# Altium PCB PCB1.PcbDoc
Units mil, origin at the board's own origin, x right, y up, seen from the top; angles counter-clockwise.
Board outline 5610.24 x 2499.17 mil, 2 copper layers (Top Layer, Bottom Layer); 30 components, 19 nets, 88 pads, 2 vias.
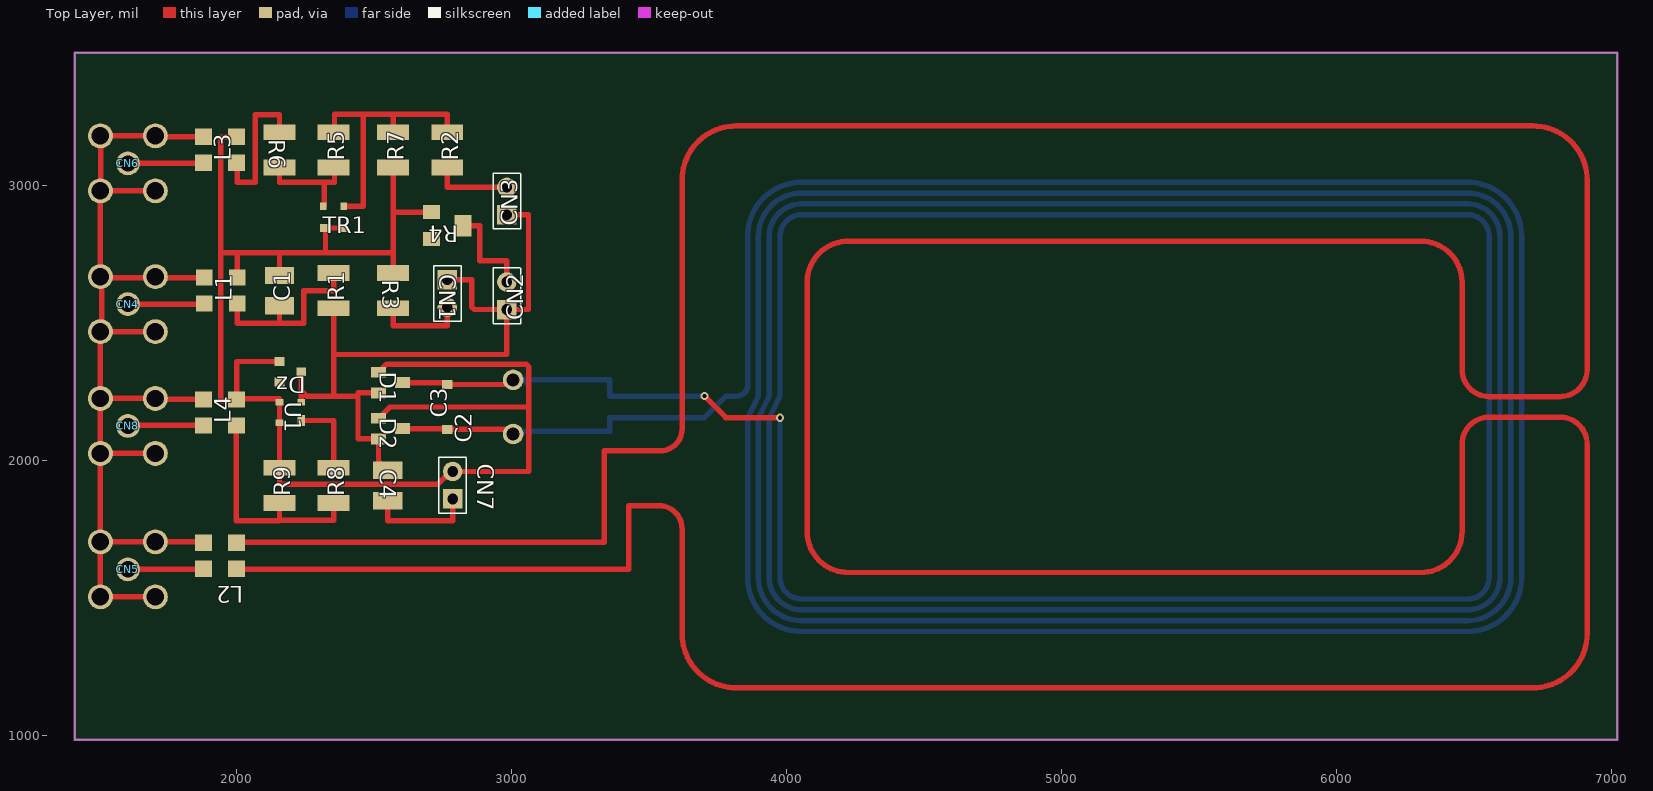
[diagram p0: Top Layer view]
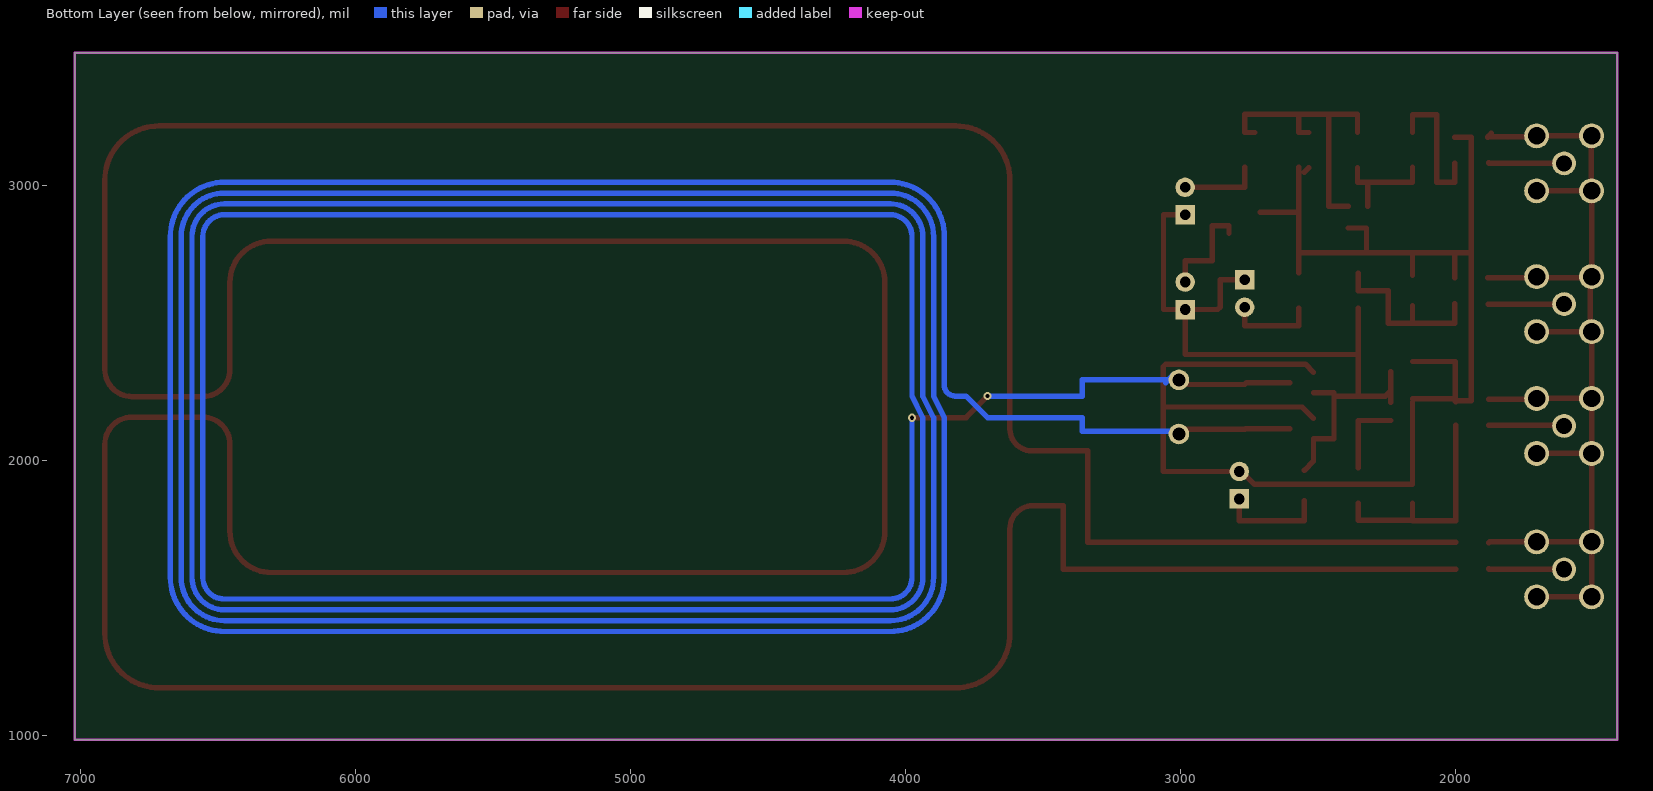
[diagram p1: Bottom Layer view, seen from below]
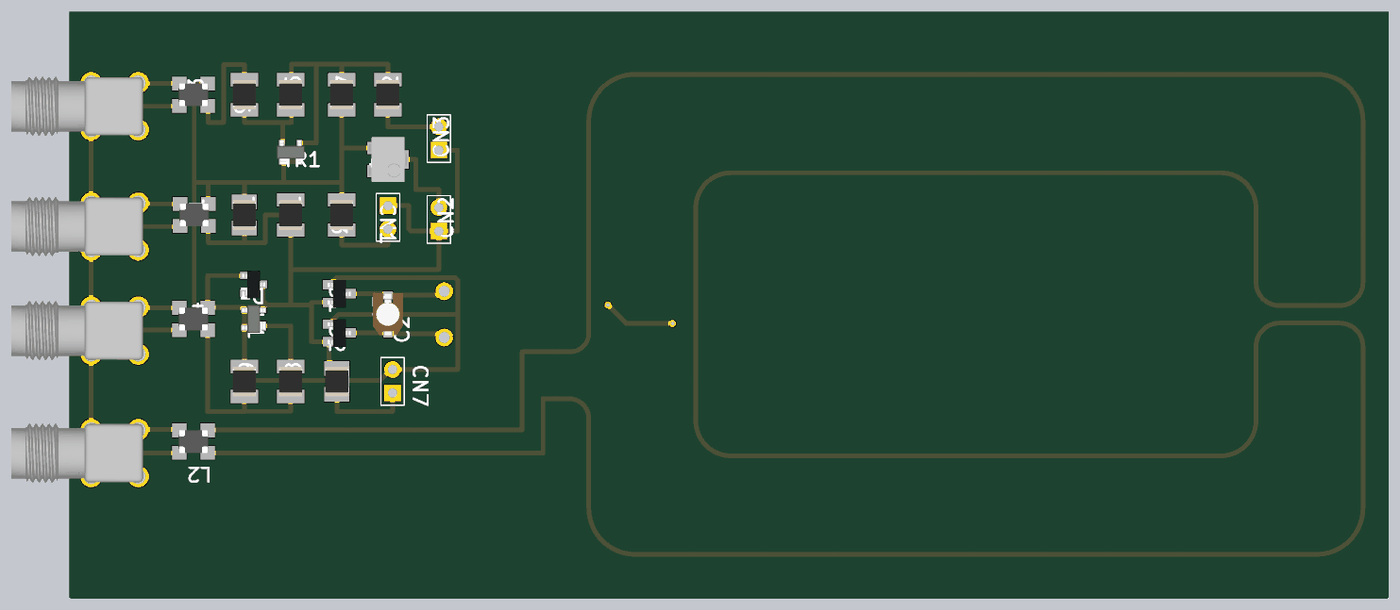
[diagram p2: 3D render of the assembled board from above, using the file's embedded part models]

## Layer stack, top to bottom
Top Solder: solder mask 0.4, Solder Resist, Dk 3.5
Top Layer: signal copper 1.4
Dielectric 1: dielectric 12.6, FR-4, Dk 4.8
Bottom Layer: signal copper 1.4
Bottom Solder: solder mask 0.4, Solder Resist, Dk 3.5

## Board outline
1410.63,984.25 1410.63,3483.43 7020.87,3483.43 7020.87,984.25

## Design rules (kind name [scope] priority, off if disabled: settings)
Clearance [All] p1: gap=10
PolygonConnect [All] p1: connectstyle=Relief reliefconductorwidth=10 reliefentries=4 polygonreliefangle="90 Angle" airgapwidth=10
RoutingVias [All] p1: holewidth=28 width=50 viastyle="Through Hole" minholewidth=28 minwidth=50 maxholewidth=28 maxwidth=50
SolderMaskExpansion [All] p1: expansion=4
Width [All] p1: maxlimit=39.37 minlimit=10 preferedwidth=19.68 minimp=50.000000 maximp=50.000000 favimp=50.000000
29 further rules are at their usual default settings.

## Components (designator, comment, footprint, x,y, rotation, side; value= is the part's Value field where it differs from the comment)
C1 "1nF" C_1210 2155.51,2618.11 r90 top
C2 "GKGXXX15" GKGXXX15 3005.12,2194.88 r90 top
C3 "TZC3" TZC3 2765.75,2194.88 r90 top
C4 "27pF" C_1210 2549.21,1909.45 r270 top
CN1 "C_2" "2x1 Pin Array" 2765.75,2657.48 r270 top
CN2 "C_2" "2x1 Pin Array" 2982.28,2549.21 r90 top
CN3 "C_2" "2x1 Pin Array" 2982.28,2893.7 r90 top
CN4 "Conector SMA" "Conector SMA" 1604.33,2568.9 r90 top
CN5 "Conector SMA" "Conector SMA" 1604.33,1604.33 r90 top
CN6 "Conector SMA" "Conector SMA" 1604.33,3080.71 r90 top
CN7 "C_2" "2x1 Pin Array" 2785.43,1860.24 r90 top
CN8 "Conector SMA" "Conector SMA" 1604.33,2125.98 r90 top
D1 "BAR43S" BAR43S 2559.06,2283.46 r270 top
D2 "BAR43S" BAR43S 2559.06,2116.14 r270 top
Dz "BZX84" BZX84 2194.88,2322.83 r270 top
L1 "ACM3225-2520-2P" ACM3225.2520-2P 1942.13,2618.11 r180 top
L2 "ACM3225-2520-2P" ACM3225.2520-2P 1938.98,1653.54 r180 top
L3 "ACM3225-2520-2P" ACM3225.2520-2P 1938.98,3129.92 r180 top
L4 "ACM3225-2520-2P" ACM3225.2520-2P 1938.98,2175.2 r180 top
R1 "51k" R_1210 2352.36,2618.11 r90 top
R2 "51" R_1210 2765.75,3129.92 r90 top
R3 "1K8" R_1210 2568.9,2618.11 r270 top
R4 "Rvar" "BOURNS 3224W" 2765.75,2854.33 r180 top
R5 "500K" R_1210 2352.36,3129.92 r270 top
R6 "110K" R_1210 2155.51,3129.92 r90 top
R7 "1K5" R_1210 2568.9,3129.92 r90 top
R8 "220" R_1210 2352.36,1909.45 r270 top
R9 "51" R_1210 2155.51,1909.45 r90 top
TR1 "BSS83" BSS83 2352.36,2885 r0 top
U1 "BCV61A" BCV61A 2194.88,2175.2 r90 top

## Footprints (in the part's own frame and the unit in brackets; to place one, negate y for a bottom-side part, rotate by r counter-clockwise, add the part's x,y. Pads: shape width x height; smd on the part's side, far side on the other; paste and mask are expansions set on the pad)
"2x1 Pin Array" [mm]
  rect 1.8x1.8 hole 1: 1(0,0)
  round 1.8 hole 1: 2(2.54,0)
  silkscreen extent -1.31,-1.27 3.84,1.27
ACM3225.2520-2P [mm]
  rect 1.55x1.5 smd: 0(-1.525,1.2) 1(-1.525,-1.2) 2(1.525,1.2) 3(1.525,-1.2)
  body extent -1.6,-1.25 1.6,1.25, height 2.3
BAR43S [mm]
  rect 1x1.4 smd: 1(-0.95,-1.1) 2(0.95,-1.1) 3(0,1.1)
  body extent -1.48,-1.25 1.52,1.25, height 1.05
BCV61A [mm]
  rect 1x0.7 smd: 1(-0.75,-1)
  rect 0.6x0.7 smd: 2(0.95,-1) 3(0.95,1) 4(-0.95,1)
  body extent -1.5,-1.25 1.5,1.25, height 1.1
"BOURNS 3224W" [mm]
  rect 1.6x1.3 smd: 1(1.45,-1.25) 2(1.45,1.25)
  rect 1.6x2 smd: 3(-1.45,0)
  body extent -1.97,-2.41 1.97,2.41, height 5.29
BSS83 [mm]
  rect 1x0.7 smd: 1(-0.75,-1)
  rect 0.6x0.7 smd: 2(0.95,-1) 3(0.95,1) 4(-0.95,1)
  body extent -1.5,-1.25 1.5,1.25, height 1.1
BZX84 [mm]
  rect 0.8x0.9 smd: 1(-0.95,-1) 2(0.95,-1) 3(0,1)
  body extent -1.48,-1.25 1.52,1.25, height 1.05
C_1210 [mm]
  rect 1.6x2.7 smd: 1(1.4,0) 2(-1.4,0)
  body extent -1.6,-1.25 1.6,1.26, height 0.53
"Conector SMA" [mm]
  round 2.2 hole 1.5: 0(0,0)
  round 2.3 hole 1.6: 1(-2.54,-2.54) 1(-2.54,2.54) 1(2.54,-2.54) 1(2.54,2.54)
  body extent -3.17,-3.05 3.17,11.15, height 11.18
GKGXXX15 [mm]
  round 1.9 hole 1.2: 0(2.5,0) 1(-2.5,0)
R_1210 [mm]
  rect 1.45x2.95 smd: 1(1.625,0) 2(-1.625,0)
  body extent -1.6,-1.25 1.6,1.26, height 0.53
TZC3 [mm]
  rect 0.85x1 smd: 0(2.075,0) 1(-2.075,0)
  body extent -2.25,-1.6 2.35,1.6, height 1.6

## Part data
C1 C4: library part Cap, "Ceramic Capacitor"
C2: "10"
CN1 CN2 CN3 CN4 CN5 CN6 CN7 CN8: "Conector 2 pines"
R1 R2 R3 R5 R6 R7 R8 R9: library part R, "Chip Resistor"
R4: "SMD Potentiometer"

## Via types
v1: diameter 29.53, hole 15.75, Top Layer to Bottom Layer, 2 vias

## Nets (pads, with @x,y where several pads share a name; then routed paths per layer and width w, separated by ;. In a path a pad name is that pad's centre, name@x,y a point inside that pad or via, vN(x,y) a via of type N, cw(c..) or ccw(c..) an arc to the next point about the centre after c; other vN are vias at no path point)
GND: CN4.1 CN5.1 CN6.1 CN8.1 L1.3 L2.3 L3.3 L4.3 | length 4444
  Top Layer w19.68: CN5.1@1504.33,1507.48 CN5.1@1504.33,1661.81 ; 1504.33,1594.49 1504.33,2468.9 CN4.1@1508.7,2473.27 ; CN4.1@1504.33,2668.9 1504.33,2979.13 CN6.1@1505.91,2980.71 ; CN6.1@1694.49,2980.71 CN6.1@1505.91,2980.71 ; CN5.1@1704.33,1504.33 1504.33,1504.33 1504.33,1704.33 1704.33,1704.33 1875.39,1704.33 L2.3 ; CN8.1@1704.33,2025.98 1504.33,2025.98 1504.33,2225.98 1704.33,2225.98 1707.87,2222.44 L4.3 ; CN4.1@1704.33,2468.9 1513.07,2468.9 CN4.1@1508.7,2473.27 ; L3.3@1868.7,3189.72 L3.3@1882.09,3176.34 ; L3.3 1698.03,3177.17 1694.49,3180.71 1505.91,3180.71 CN6.1@1505.91,2980.71 ; L1.3 1509.53,2665.35 1508.7,2664.53 CN4.1@1508.7,2473.27
NetC1_1: C1.1 CN7.2 D1.1 D2.1 Dz.1 L1.1 L3.1 L4.1 R3.2 R4.1 R7.2 R9.1 TR1.1 TR1.2 U1.3 U1.4 | length 5761.9
  Top Layer w19.68: L1.1 2002.17,2755.91 ; L3.1@2002.17,3176.34 1942.13,3176.34 1942.13,2755.91 ; L4.1@2008.86,2224.41 U1.3@2155.51,2224.41 ; U1.3 U1.4 R9.1 2155.51,1913.23 2730.16,1913.23 2777.17,1960.24 CN7.2 3062.36,1960.24 3062.36,2194.88 ; Dz.1 2000,2360.24 2000,2215.55 1999.02,2214.57 1995.87,2217.72 1942.13,2217.72 1942.13,2755.91 ; C1.1 2155.51,2755.91 ; TR1.2 TR1.1 2322.83,2755.91 ; D2.1 2557.09,2194.88 3062.36,2194.88 ; D1.1 2545.43,2350.55 3052.99,2350.55 3062.36,2341.18 3062.36,2194.88 ; R7.2@2532.68,3065.12 R7.2@2549.21,3048.58 ; R3.2 2568.9,2755.91 ; R7.2 2568.9,2903.54 ; R4.1 2568.9,2903.54 ; 1942.13,2755.91 2002.17,2755.91 ; 2002.17,2755.91 2155.51,2755.91 ; 2155.51,2755.91 2322.83,2755.91 ; 2322.83,2755.91 2568.9,2755.91 ; 2568.9,2755.91 2568.9,2903.54
NetC1_2: C1.2 L1.0 R1.1 | length 666.1
  Top Layer w19.68: L1.0 2002.17,2500 2155.51,2500 ; C1.2 2155.51,2500 ; R1.1 2352.36,2618.11 2244.09,2618.11 2244.09,2500 2155.51,2500
NetC2_0: C2.0 C2.1 C3.0 C3.1 D1.3 D2.3 | length 35497
  Top Layer w19.68: D2.3 2762.8,2116.14 C3.1 2988.39,2113.19 C2.1 ; D1.3 2758.86,2283.46 C3.0 2988.39,2276.57 C2.0 ; v1(3700.87,2234.61) 3778.98,2155.87 v1(3975.87,2155.87)
  Bottom Layer w19.68: C2.1@3005.12,2106.3 3356.3,2106.3 3356.3,2155.87 3700.87,2155.87 3779.61,2234.61 3818.98,2234.61 ccw(c3818.98,2273.98) 3858.35,2273.98 ; C2.0@3023.98,2312.99 3053.5,2283.46 ; 3053.5,2293.31 3356.3,2293.31 3356.65,2292.95 3356.65,2234.61 v1(3700.87,2234.61) ; 3857.76,2273.98 3857.76,2815.31 cw(c4054.61,2815.31) 4054.61,3012.17 6475.87,3012.17 cw(c6475.87,2815.32) 6672.72,2815.32 6672.72,1575.16 cw(c6475.87,1575.16) 6475.87,1378.31 4054.61,1378.31 cw(c4054.61,1575.16) 3857.76,1575.16 3857.76,2155.87 3897.13,2234.61 3897.13,2815.32 cw(c4054.61,2815.32) 4054.61,2972.8 6475.87,2972.8 cw(c6475.87,2815.32) 6633.35,2815.32 6633.35,1575.16 cw(c6475.87,1575.16) 6475.87,1417.68 4054.61,1417.68 cw(c4054.61,1575.16) 3897.13,1575.16 ; 3897.13,1573.39 3897.13,2155.87 3936.5,2234.61 3936.5,2815.32 cw(c4054.61,2815.32) 4054.61,2933.43 6475.87,2933.43 cw(c6475.87,2815.32) 6593.98,2815.32 6593.98,1575.16 cw(c6475.87,1575.16) 6475.87,1457.05 4054.61,1457.05 cw(c4054.61,1575.16) 3936.5,1575.16 3936.5,2155.87 3975.87,2234.61 3975.87,2815.32 cw(c4054.61,2815.32) 4054.61,2894.06 6475.87,2894.06 cw(c6475.87,2815.32) 6554.61,2815.32 6554.61,1575.16 cw(c6475.87,1575.16) 6475.87,1496.42 4054.61,1496.42 cw(c4054.61,1575.16) 3975.87,1575.16 v1@3975.87,2150.04
NetC4_1: C4.1 CN7.1 | length 387.8
  Top Layer w19.68: C4.1 2549.21,1781.5 2785.43,1781.5 CN7.1
NetC4_2: C4.2 CN1.1 CN2.1 CN3.1 D1.2 D2.2 Dz.3 R1.2 U1.2 | length 2695.1
  Top Layer w19.68: U1.2 2234.25,2253.94 ; Dz.3 2234.25,2253.94 ; R1.2 2352.36,2391.73 ; 2440.94,2246.06 D1.2 ; C4.2 2515.75,1998.03 D2.2 2440.94,2078.74 2440.94,2234.25 2352.36,2234.25 ; CN1.1 2854.33,2657.48 2854.33,2559.06 2864.17,2549.21 CN2.1 ; CN3.1 3061.02,2893.7 3061.02,2549.21 CN2.1 ; 2234.25,2253.94 2253.94,2234.25 2352.36,2234.25 ; 2352.36,2234.25 2352.36,2391.73 ; 2352.36,2391.73 2358.43,2385.67 2982.28,2385.67 CN2.1
NetCN1_2: CN1.2 R3.1 | length 328.1
  Top Layer w19.68: R3.1 2568.9,2490.16 2765.75,2490.16 CN1.2
NetCN2_2: CN2.2 R4.3 | length 392.1
  Top Layer w19.68: R4.3@2822.83,2826.77 R4.3 2883.86,2854.33 2883.86,2726.38 2982.28,2726.38 CN2.2
NetCN3_2: CN3.2 R2.2 | length 288.8
  Top Layer w19.68: R2.2 2765.75,2993.7 CN3.2
NetCN4_0: CN4.0 L1.2 | length 276.6
  Top Layer w19.68: CN4.0 L1.2@1880.94,2568.9
NetCN5_0: CN5.0 L2.2 | length 275.4
  Top Layer w19.68: CN5.0 1876.97,1604.33 L2.2
NetCN6_0: CN6.0 L3.2 | length 285.3
  Top Layer w19.68: CN6.0@1594.49,3080.71 1876.97,3080.71 L3.2
NetCN8_0: CN8.0 L4.2 | length 275.4
  Top Layer w19.68: CN8.0 1606.3,2127.95 L4.2
NetL2_0: L2.0 L2.1 | length 21374.4
  Top Layer w19.68: L2.0@1999.02,1604.33 3425.2,1604.33 3425.2,1835.79 3535.75,1835.79 cw(c3535.75,1751.97) 3619.57,1751.97 3619.57,1370.43 ccw(c3816.42,1370.43) 3816.42,1173.58 6714.06,1173.58 ccw(c6714.06,1370.43) 6910.91,1370.43 6910.91,2059.41 ccw(c6812.48,2059.41) 6812.48,2157.83 6554.61,2157.83 ccw(c6554.61,2059.41) 6456.18,2059.41 6456.18,1742.48 cw(c6306.57,1742.48) 6306.57,1592.87 4223.9,1592.87 cw(c4223.9,1742.48) 4074.29,1742.48 4074.29,2647.99 cw(c4223.9,2647.99) 4223.9,2797.6 6306.57,2797.6 cw(c6306.57,2647.99) 6456.18,2647.99 6456.18,2331.06 ccw(c6554.61,2331.06) 6554.61,2232.64 6812.48,2232.64 ccw(c6812.48,2331.06) 6910.91,2331.06 6910.91,3020.04 ccw(c6714.06,3020.04) 6714.06,3216.89 3816.42,3216.89 ccw(c3816.42,3020.04) 3619.57,3020.04 3619.57,2114.53 cw(c3540.83,2114.53) 3540.83,2035.79 3336.61,2035.79 3336.61,1702.76 L2.1@1999.02,1702.76
NetL3_0: L3.0 R6.1 | length 533.4
  Top Layer w19.68: L3.0@2002.17,3081.85 2002.17,3011.81 2066.93,3011.81 2066.93,3257.87 2155.51,3257.87 R6.1
NetL4_0: L4.0 R8.1 R9.2 | length 890.6
  Top Layer w19.68: L4.0 1999.02,1781.5 2155.51,1781.5 R9.2 2155.51,1783.46 2154.53,1782.48 2351.38,1782.48 2352.36,1783.46 R8.1
NetR2_1: R2.1 R5.2 R7.1 TR1.3 | length 1089
  Top Layer w19.68: R5.2@2355.51,3193.07 2355.51,3260 2765.75,3260 R2.1 2764.92,3193.07 R2.1@2729.53,3193.07 ; TR1.3 2460.63,2924.37 2460.63,3260 ; R7.1@2532.68,3193.07 2568.07,3193.07 R7.1 2568.9,3260
NetR5_1: R5.1 R6.2 TR1.4 | length 391.7
  Top Layer w19.68: R6.2 2155.51,3011.81 2355.51,3011.81 R5.1@2355.51,3065.12 ; TR1.4@2318.39,2924.37 2318.39,3008.58
NetR8_2: R8.2 U1.1 | length 290.4
  Top Layer w19.68: U1.1 2352.36,2145.67 R8.2
pads on no net: Dz.2 R4.2

## Keep-outs
Keep-Out Layer:
  the board outline again, w10

## Silkscreen, mask and mechanical layers (free items; w line width, h text height)
Mechanical 1:
  lines w3.94: 3956.18,2076.93 3956.18,2346.93
  lines w10: 3700.87,2234.61 3700.87,2155.87 3740.24,2195.24 3779.61,2234.61 ; 3779.61,2195.24 3818.98,2234.61 ; 3857.76,2216.93 3857.76,2295.67 3857.76,2335.04 ; 3877.44,2197.24 3916.81,2197.24 3956.18,2197.24 ; 3975.87,1866.93 3975.87,2536.93 ; 3975.87,2155.87 3619.57,2155.87 3619.57,2195.24 3619.57,2234.61 3975.87,2234.61 ; 4948.98,2894.06 5503.98,2894.06 ; 4993.98,1496.42 5653.98,1496.42 ; 6554.61,1786.93 6554.61,2621.93 ; 3706.18,3258.23 ccw(c3706.18,3132.24) 3580.2,3132.24 3580.2,3041.69 3580.2,1348.78 3580.2,1258.23 ccw(c3706.18,1258.23) 3706.18,1132.24 6824.29,1132.24 ccw(c6824.29,1258.23) 6950.28,1258.23 6950.28,3132.24 ccw(c6824.29,3132.24) 6824.29,3258.23 ; 3706.18,3258.23 6824.29,3258.23 ; 3706.18,3258.23 6824.29,3258.23 ; 3975.87,2234.61 3936.5,2155.87 3936.5,2195.24 3936.5,2234.61 3975.87,2234.61

## Dimensions
1410.63,984.25 to 7020.87,984.25 on Top Overlay